# Altium PCB 剥皮器20200614.PCBDOC (part 3 of 3)
Units mm, origin at the board's own origin, x right, y up, seen from the top; angles counter-clockwise.
Board outline 140 x 88 mm, 4 copper layers (Top Layer, MidLayer1, MidLayer2, Bottom Layer); 134 components, 105 nets, 507 pads, 469 vias.
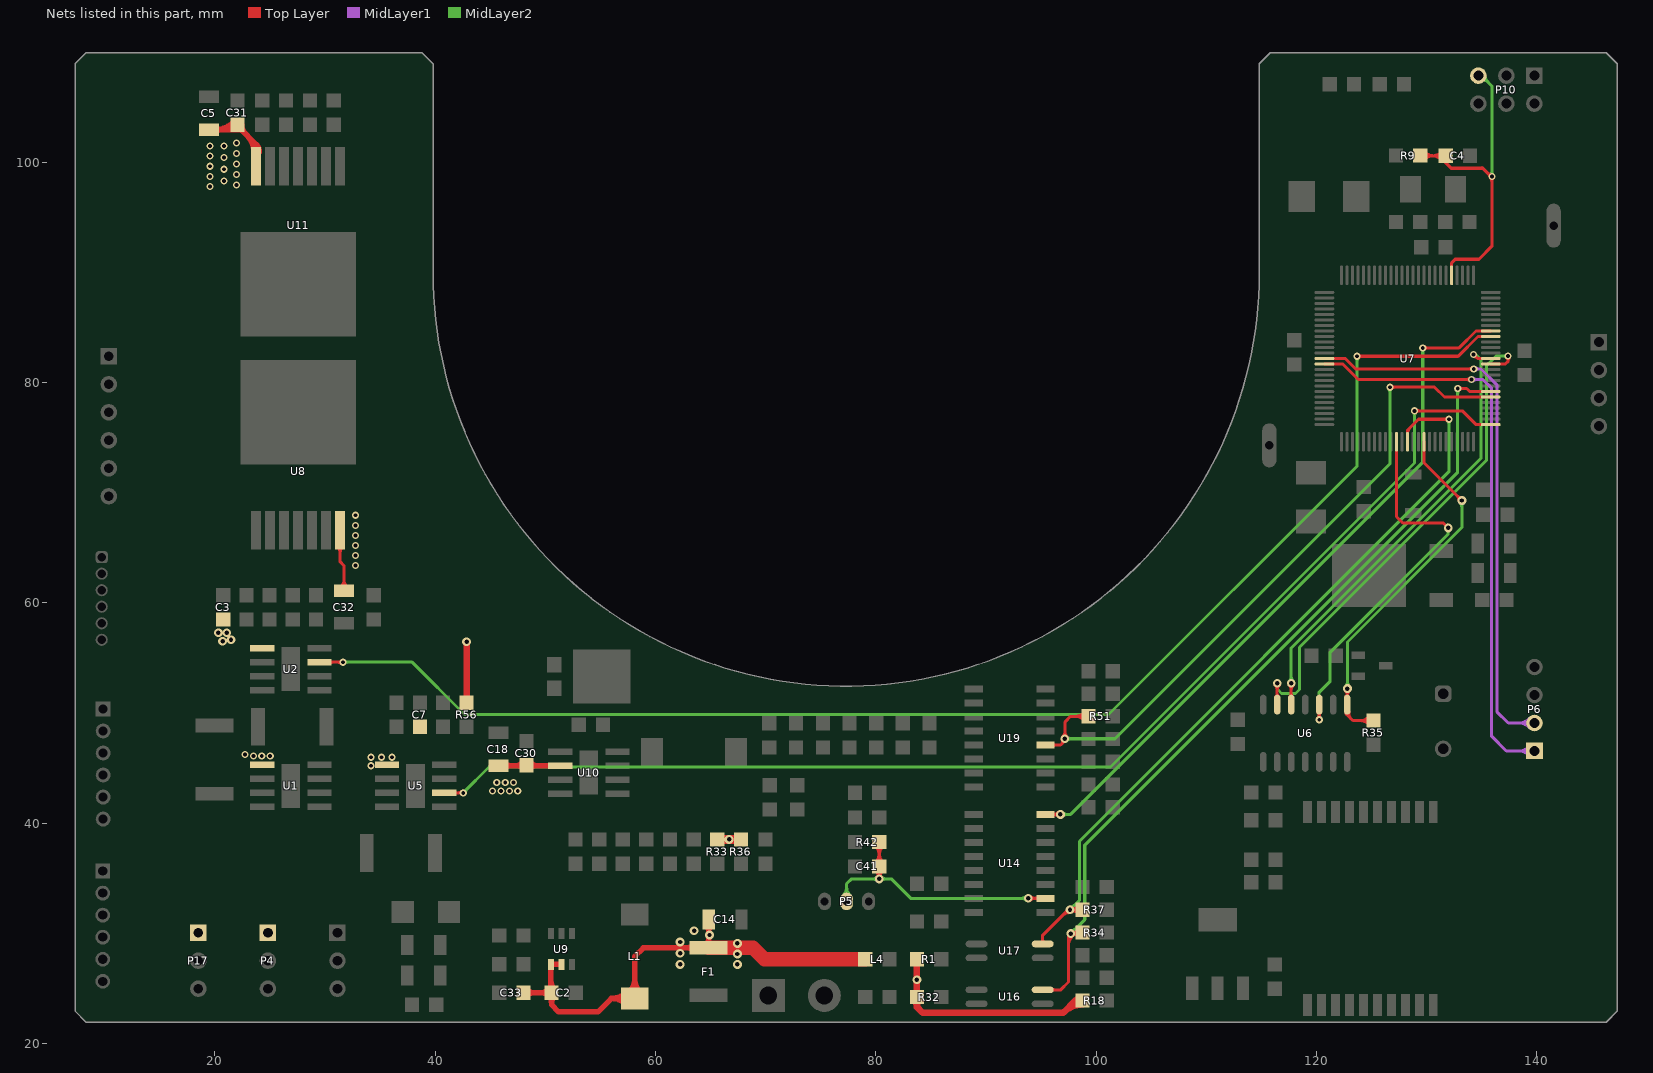
[diagram p5: the nets of this part, all layers, seen from the top]

## Via types
v1: diameter 0.65, hole 0.35, Top Layer to Bottom Layer, 296 vias
v2: diameter 0.8, hole 0.4, Top Layer to Bottom Layer, 161 vias
v3: diameter 1.27, hole 0.711, Top Layer to Bottom Layer, 6 vias
v4: diameter 1, hole 0.5, Top Layer to Bottom Layer, 6 vias

## Nets (pads, with @x,y where several pads share a name; then routed paths per layer and width w, separated by ;. In a path a pad name is that pad's centre, name@x,y a point inside that pad or via, vN(x,y) a via of type N, cw(c..) or ccw(c..) an arc to the next point about the centre after c; other vN are vias at no path point) (continued)
PE4: R51.2 U7.6 U19.12 | length 68.7
  Top Layer w0.28: U19.12@95.393,47.086 96.77,47.086 97.18,47.496 97.18,49.197 97.673,49.69 R51.2@99.306,49.69 ; U19.12@96.024,46.955 cw(c96.34,46.64) 96.34,47.086 cw(c96.34,47.533) U19.12@96.024,47.217 ; 96.865,47.181 ccw(c96.648,47.398) v2@96.921,47.538 ; v2@96.968,47.841 ccw(c96.457,48.352) 97.18,48.352 ; 97.18,48.217 ccw(c97.712,48.217) v2@97.336,47.841 ; R51.2@98.947,49.331 ccw(c98.081,48.465) 98.081,49.69 ccw(c98.081,50.916) R51.2@98.947,50.049 ; v1@126.666,79.572 130.719,79.572 131.614,78.676 U7.6@135.817,78.676 ; v1@126.795,79.441 cw(c127.111,79.125) 127.111,79.572 cw(c127.111,80.018) v1@126.795,79.702
  MidLayer2 w0.28: v2(97.152,47.657) 101.715,47.657 102.982,48.924 126.666,72.609 v1@126.666,79.572 ; v2@97.336,47.473 cw(c97.78,47.029) 97.78,47.657 cw(c97.78,48.285) v2@97.336,47.841 ; v1@126.533,79.441 cw(c126.212,79.119) 126.666,79.119 ; 126.666,79.131 cw(c127.105,79.131) v1@126.795,79.441
  other v1: 126.664,79.572
PE5: R34.1 U7.7 U16.4 | length 82.2
  Top Layer w0.28: U16.4@95.143,24.867 96.783,24.867 97.495,25.579 97.495,29.772 v2(97.691,29.968) ; U16.4@95.956,24.753 cw(c96.229,24.48) 96.229,24.867 cw(c96.229,25.253) U16.4@95.956,24.98 ; 97.495,28.867 cw(c98.792,28.867) 97.875,29.784 cw(c98.319,29.34) 98.319,29.968 cw(c98.319,30.596) v2@97.875,30.152 ; 97.495,29.543 cw(c98.116,29.543) v2@97.677,29.982 ; v2@97.786,29.968 cw(c97.786,29.094) R34.1@98.405,29.712 ; R34.1@98.327,30.33 cw(c97.691,30.708) v2(97.691,29.968) ; R34.1@98.531,29.968 v2(97.691,29.968) ; v1@132.663,79.46 133.625,79.46 133.908,79.176 U7.7@135.817,79.176 ; v1@132.948,79.313 cw(c133.301,78.96) 133.301,79.46 ; v1@132.948,79.575 ccw(c133.226,79.853) 133.226,79.46
  MidLayer2 w0.28: v2(97.691,29.968) 98.963,31.24 98.963,37.995 132.817,71.849 v1(132.817,79.444) ; v2@97.691,30.228 ccw(c97.691,30.856) 98.135,30.412 ccw(c98.579,29.968) v2@97.951,29.968 ; v1@132.686,79.313 cw(c132.37,78.997) 132.817,78.997 cw(c133.264,78.997) v1@132.948,79.313
PF6: R35.2 U6.8 U7.91 | length 41.7
  Top Layer w0.28: v2@122.623,52.03 cw(c122.179,51.586) 122.807,51.586 cw(c123.435,51.586) v2@122.991,52.03 ; U6.8@122.667,50.184 ccw(c123.033,50.103) 122.768,49.838 ; U6.8@122.671,51.472 ccw(c122.342,51.801) 122.807,51.801 ; U6.8@122.784,50.501 122.784,49.822 ; U6.8@122.807,50.501 v2(122.807,52.214) ; 122.807,51.689 ccw(c123.114,51.689) U6.8@122.897,51.472 ; U6.8@122.94,50.124 ccw(c123.624,49.973) 123.129,49.477 ; R35.2@124.812,48.95 ccw(c123.946,48.084) 123.946,49.309 ccw(c123.946,50.535) R35.2@124.812,49.668 ; R35.2@125.171,49.309 123.297,49.309 122.784,49.822 ; U7.91@129.767,74.626 129.767,72.715 v2(133.195,69.287) ; v2@132.935,69.287 ccw(c132.307,69.287) 132.751,69.731 ccw(c133.195,70.175) v2@133.195,69.547 ; 122.784,49.822 ccw(c122.511,49.822) 122.683,50.034 cw(c122.511,49.822) 122.784,49.822 ; 122.784,49.822 cw(c123.057,49.822) 122.885,50.034 ccw(c123.057,49.822) 122.784,49.822
  MidLayer2 w0.28: v2@122.623,52.398 ccw(c122.179,52.842) 122.807,52.842 ccw(c123.435,52.842) v2@122.991,52.398 ; v2(122.807,52.214) 122.807,56.442 133.195,66.83 v2(133.195,69.287) ; v2@133.011,69.103 cw(c132.567,68.659) 133.195,68.659 cw(c133.823,68.659) v2@133.379,69.103
PG5: U5.2 U7.1 | length 116.2
  Top Layer w0.28: U5.2@40.813,42.748 v1(42.545,42.748) ; U5.2@41.727,42.635 cw(c42,42.362) 42,42.748 cw(c42,43.134) U5.2@41.727,42.861 ; v1@42.414,42.617 ccw(c42.098,42.302) 42.098,42.748 ccw(c42.098,43.195) v1@42.414,42.879 ; v1(128.902,77.427) 133.245,77.427 134.495,76.176 U7.1@135.817,76.176 ; v1@129.032,77.296 cw(c129.348,76.98) 129.348,77.427 cw(c129.348,77.873) v1@129.032,77.557
  MidLayer2 w0.28: v1@42.545,42.933 ccw(c42.545,43.38) 42.861,43.064 ccw(c43.177,42.748) v1@42.73,42.748 ; v1@42.621,42.748 v1(42.545,42.748) 44.885,45.088 101.305,45.088 128.902,72.685 v1(128.902,77.427) ; v1@128.771,77.296 cw(c128.455,76.98) 128.902,76.98 cw(c129.348,76.98) v1@129.032,77.296
PH0_RXD2: U6.13 U7.12 | length 50.2
  Top Layer w0.28: v2@116.25,52.513 cw(c115.806,52.069) 116.434,52.069 cw(c117.061,52.069) v2@116.618,52.513 ; U6.13@116.321,51.472 ccw(c116.048,51.745) 116.434,51.745 ccw(c116.82,51.745) U6.13@116.547,51.472 ; U6.13@116.434,50.758 v2(116.434,52.697) ; U7.12@135.817,81.676 137.142,81.676 137.395,81.929 v1(137.395,82.391) ; v1@137.264,82.26 cw(c136.948,81.944) 137.395,81.944 cw(c137.842,81.944) v1@137.526,82.26
  MidLayer2 w0.28: v2(116.434,52.697) 116.434,52.161 ; v1@137.264,82.26 ccw(c136.948,81.944) 136.948,82.391 ccw(c136.948,82.838) v1@137.264,82.522 ; v1(137.395,82.391) 136.296,82.391 135.432,81.527 135.432,72.938 118.45,55.956 118.45,52.127 118.089,51.766 116.829,51.766 116.434,52.161 ; 116.434,52.161 ccw(c116.012,52.161) 116.273,52.493 cw(c116.012,52.161) 116.434,52.161 ; 116.434,52.161 cw(c116.855,52.161) 116.595,52.493 ccw(c116.855,52.161) 116.434,52.161
PH1_TXD2: U6.12 U7.13 | length 45
  Top Layer w0.28: v2@117.52,52.513 cw(c117.076,52.069) 117.704,52.069 cw(c118.331,52.069) v2@117.888,52.513 ; U6.12@117.591,51.472 ccw(c117.318,51.745) 117.704,51.745 ccw(c118.09,51.745) U6.12@117.817,51.472 ; U6.12@117.704,50.758 v2(117.704,52.697) ; v1@134.245,82.369 cw(c134.245,81.922) 134.561,82.238 cw(c134.877,82.554) v1@134.43,82.554 ; v1(134.245,82.554) 134.622,82.176 U7.13@135.817,82.176
  MidLayer2 w0.28: v2@117.52,52.881 ccw(c117.076,53.324) 117.704,53.324 ccw(c118.331,53.324) v2@117.888,52.881 ; v2(117.704,52.697) 117.704,55.896 134.952,73.144 134.952,82.008 134.406,82.554 v1(134.245,82.554) ; v1@134.245,82.369 cw(c134.245,81.533) 134.836,82.124
PH5: U2.3 U7.17 | length 131.7
  Top Layer w0.28: U2.3@29.499,54.61 v1(31.623,54.61) ; U2.3@30.412,54.497 cw(c30.685,54.224) 30.685,54.61 cw(c30.685,54.996) U2.3@30.412,54.723 ; v1@31.492,54.479 ccw(c31.176,54.163) 31.176,54.61 ccw(c31.176,55.057) v1@31.492,54.741 ; v1(123.686,82.38) 132.864,82.38 134.661,84.176 U7.17@135.817,84.176 ; v1@123.817,82.249 cw(c124.133,81.933) 124.133,82.38 cw(c124.133,82.826) v1@123.817,82.51
  MidLayer2 w0.28: v1(31.623,54.61) 37.903,54.61 42.653,49.859 101.123,49.859 123.686,72.422 v1(123.686,82.38) ; v1@31.754,54.479 cw(c32.07,54.163) 32.07,54.61 cw(c32.07,55.057) v1@31.754,54.741 ; v1@123.555,82.249 cw(c123.239,81.933) 123.686,81.933 cw(c124.133,81.933) v1@123.817,82.249
PH6: U7.18 U14.8 | length 68.8
  Top Layer w0.28: U14.8@95.393,40.792 v2@96.783,40.792 ; U14.8@96.024,40.661 cw(c96.34,40.346) 96.34,40.792 cw(c96.34,41.239) U14.8@96.024,40.923 ; v2@96.564,40.608 ccw(c96.121,40.165) 96.121,40.792 ccw(c96.121,41.42) v2@96.564,40.976 ; v1(129.647,83.142) 132.947,83.142 134.482,84.676 U7.18@135.817,84.676 ; v1@129.777,83.011 cw(c130.093,82.695) 130.093,83.142 cw(c130.093,83.588) v1@129.777,83.272
  MidLayer2 w0.28: v2@96.783,40.792 97.688,40.792 129.647,72.751 v1(129.647,83.142) ; v2@96.932,40.608 cw(c97.376,40.165) 97.376,40.792 cw(c97.376,41.42) v2@96.932,40.976 ; v1@129.516,83.011 cw(c129.2,82.695) 129.647,82.695 cw(c130.093,82.695) v1@129.777,83.011
  other v2: 96.748,40.792
PJ0_RX3: P6.2 U7.63 | length 55.1
  Top Layer w0.28: U7.63@120.717,82.176 122.61,82.176 123.556,81.231 v1(134.273,81.231) ; v1@134.142,81.1 ccw(c133.826,80.784) 133.826,81.231 ccw(c133.826,81.677) v1@134.142,81.361
  MidLayer1 w0.28: v1(134.273,81.231) 134.936,81.231 136.377,79.79 136.377,50.124 137.413,49.088 P6.2@139.79,49.088 ; v1@134.404,81.1 cw(c134.72,80.784) 134.72,81.231 cw(c134.72,81.677) v1@134.404,81.361 ; P6.2@139.359,48.657 ccw(c138.317,47.616) 138.317,49.088 ccw(c138.317,50.561) P6.2@139.359,49.52 ; P6.2@139.557,48.855 ccw(c138.993,48.292) 138.993,49.088 ccw(c138.993,49.885) P6.2@139.557,49.322
PJ1_TX3: P6.1 U7.64 | length 57.1
  Top Layer w0.28: U7.64@120.717,81.676 122.397,81.676 123.802,80.272 v1(134.084,80.272) ; v1@133.953,80.141 ccw(c133.637,79.825) 133.637,80.272 ccw(c133.637,80.718) v1@133.953,80.402
  MidLayer1 w0.28: v1(134.084,80.272) 135.104,80.272 135.897,79.479 135.897,47.881 137.23,46.548 P6.1@139.79,46.548 ; v1@134.215,80.141 cw(c134.531,79.825) 134.531,80.272 cw(c134.531,80.718) v1@134.215,80.402 ; P6.1@139.359,46.117 ccw(c138.317,45.076) 138.317,46.548 ccw(c138.317,48.021) P6.1@139.359,46.98 ; P6.1@139.557,46.315 ccw(c138.993,45.752) 138.993,46.548 ccw(c138.993,47.345) P6.1@139.557,46.782
PK1: R37.1 U7.88 U17.4 | length 76.7
  Top Layer w0.28: U17.4@95.03,29.145 ccw(c94.757,29.418) 95.143,29.418 ccw(c95.529,29.418) U17.4@95.256,29.145 ; U17.4@95.143,29.032 95.143,29.828 97.451,32.136 R37.1@98.764,32.136 ; 96.89,31.575 cw(c97.621,30.845) v2@97.621,31.878 ; v2@97.805,31.954 cw(c98.245,31.514) R37.1@98.245,32.136 ; v2@97.805,32.322 ccw(c98.253,32.77) R37.1@98.253,32.136 ; R37.1@98.405,31.777 ccw(c97.538,30.911) 97.538,32.136 ccw(c97.538,33.362) R37.1@98.405,32.495 ; U7.88@128.267,74.626 128.267,75.665 129.266,76.665 v1@132.159,76.665 ; U7.88@128.267,75.386 cw(c128.94,75.386) 128.464,75.862 ; 131.556,76.665 cw(c131.556,76.195) v1@131.888,76.527 ; 131.588,76.665 ccw(c131.588,77.089) v1@131.888,76.789
  MidLayer2 w0.28: v2(97.621,32.138) 98.483,33 98.483,38.348 132.019,71.884 v1(132.019,76.658) ; v2@97.621,32.398 ccw(c97.621,33.026) 98.065,32.582 ccw(c98.509,32.138) v2@97.881,32.138 ; v1@131.888,76.527 cw(c131.572,76.211) 132.019,76.211 cw(c132.466,76.211) v1@132.15,76.527
PK3: U6.10 U7.86 | length 38
  Top Layer w0.28: v1@120.113,49.521 ccw(c119.797,49.837) 120.244,49.837 ccw(c120.69,49.837) v1@120.375,49.521 ; U6.10@120.131,50.045 cw(c119.858,49.772) 120.244,49.772 cw(c120.63,49.772) U6.10@120.357,50.045 ; v1(120.244,49.39) U6.10@120.244,50.758 ; U7.86@127.267,74.626 127.267,67.816 127.84,67.243 131.512,67.243 v2(131.953,66.802)
  MidLayer2 w0.28: v1@120.113,49.521 ccw(c119.797,49.837) 120.244,49.837 ccw(c120.69,49.837) v1@120.375,49.521 ; v1(120.244,49.39) 120.244,51.877 121.24,52.873 121.24,55.526 131.953,66.239 v2(131.953,66.802) ; v2@131.842,67.038 cw(c131.398,66.594) v2@132.026,66.594
RESET: C4.1 P10.5 R9.1 U7.30 | length 36.8
  Top Layer w0.28: R9.1@129.767,100.238 cw(c130.575,99.429) 130.575,100.573 ; R9.1@129.767,100.956 ccw(c130.691,101.88) 130.691,100.573 ; R9.1@129.83,100.573 C4.1@131.739,100.573 131.739,99.906 ; C4.1@131.38,100.214 ccw(c130.513,99.347) 130.513,100.573 ccw(c130.513,101.798) C4.1@131.38,100.932 ; C4.1@131.604,100.083 cw(c131.555,99.906) 131.739,99.906 ; C4.1@131.739,99.941 132.229,99.451 135.042,99.451 ; C4.1@131.874,100.083 ccw(c131.922,99.906) 131.739,99.906 ; U7.30@132.267,89.726 132.267,90.865 132.588,91.186 134.752,91.186 135.918,92.352 135.918,98.624 135.042,99.5 ; 135.495,99.047 ccw(c135.918,99.471) v1@135.918,98.872 ; 135.647,98.895 cw(c135.438,98.687) v1@135.733,98.687 ; v1@135.787,98.556 cw(c135.471,98.24) 135.918,98.24 cw(c136.365,98.24) v1@136.049,98.556
  MidLayer2 w0.28: P10.5@134.696,107.855 134.982,107.855 135.918,106.919 v1@135.918,98.759 ; P10.5@134.727,107.527 cw(c134.833,106.391) 135.639,107.198 ; P10.5@135.306,107.855 ccw(c136.089,107.855) 135.536,107.301 ; v1@135.787,98.818 ccw(c135.471,99.134) 135.918,99.134 ccw(c136.365,99.134) v1@136.049,98.818
  other v1: 135.918,98.687
VCC: C2.1 C3.1 C5.1 C7.1 C14.1 C18.1 C30.2 C31.1 C32.1 C33.2 F1.2 L1.1 L4.1 P4.1 P17.1 R1.1 R18.2 R32.1 R33.1 R36.1 R56.2 U1.5 U2.5 U5.5 U8.7 U9.4 U9.5 U10.2 U11.7 | length 125.8
  Top Layer w0.28: U8.7@31.15,65.08 cw(c30.621,64.55) 31.369,64.55 cw(c32.117,64.55) U8.7@31.588,65.08 ; U8.7@31.369,66.599 31.369,63.722 31.725,63.366 C32.1@31.725,61.104 ; C32.1@31.424,61.404 ccw(c30.699,62.13) 31.725,62.13 ccw(c32.751,62.13) C32.1@32.025,61.404
  Top Layer w0.5: C5.1@19.456,102.955 C31.1@22.056,102.955 ; C5.1@20.014,102.732 cw(c20.552,102.194) 20.552,102.955 cw(c20.552,103.715) C5.1@20.014,103.178 ; C5.1@20.023,102.955 ccw(c20.023,105.42) C31.1@21.766,103.677 ; 21.23,102.955 ccw(c21.23,104.213) C31.1@22.12,103.323 ; C31.1@22.047,102.998 cw(c22.047,102.264) C31.1@22.566,102.783 ; C31.1@22.225,103.124 23.749,101.6 U11.7@23.749,99.619 ; C31.1@22.445,103.396 ccw(c23.631,103.396) 22.792,102.557 ; 22.926,102.423 cw(c21.422,100.919) U11.7@23.549,100.919 ; U11.7@23.608,101.06 ccw(c23.266,101.402) 23.749,101.402 ccw(c24.232,101.402) U11.7@23.89,101.06 ; 23.779,101.57 cw(c23.129,100.919) U11.7@24.049,100.919 ; C18.1@45.754,45.212 U10.2@51.35,45.212 ; C18.1@46.303,44.998 cw(c46.82,44.481) 46.82,45.212 ; C18.1@46.303,45.443 ccw(c46.862,46.002) 46.862,45.212 ; 47.221,45.212 ccw(c47.221,46.319) C30.2@48.004,45.536 ; 47.429,45.212 cw(c47.429,44.399) C30.2@48.004,44.974 ; C33.2@48.01,24.61 C2.1@50.559,24.61 50.559,23.515 51.211,22.863 54.76,22.863 55.987,24.09 L1.1@58.111,24.09 58.111,27.887 58.903,28.679 F1.2@64.816,28.679 ; C33.2@48.291,24.328 cw(c48.97,23.649) 48.97,24.61 cw(c48.97,25.57) C33.2@48.291,24.891 ; C30.2@48.567,44.974 cw(c49.142,44.399) 49.142,45.212 ; C30.2@48.567,45.536 ccw(c49.349,46.319) 49.349,45.212 ; C2.1@50.506,24.663 U9.4@50.506,27.172 U9.5@51.456,27.172 ; 50.506,25.441 cw(c49.728,25.441) 50.278,24.891 cw(c49.599,25.57) 49.599,24.61 cw(c49.599,23.649) 50.278,24.328 cw(c49.599,23.649) 50.559,23.649 cw(c51.52,23.649) C2.1@50.841,24.328 ; 50.506,25.698 ccw(c51.648,25.698) C2.1@50.841,24.891 ; L1.1@57.33,23.56 ccw(c56.05,22.28) 56.05,24.09 ccw(c56.05,25.901) L1.1@57.33,24.621 ; L1.1@57.58,24.621 ccw(c56.3,25.901) 58.111,25.901 ccw(c59.921,25.901) L1.1@58.641,24.621 ; F1.2@63.459,28.431 ccw(c62.861,27.834) 62.861,28.679 ccw(c62.861,29.524) F1.2@63.459,28.926 ; F1.2@64.569,28.926 ccw(c63.95,29.545) v2@64.825,29.545 ; C14.1@64.602,30.707 cw(c64.065,30.169) 64.825,30.169 cw(c65.586,30.169) C14.1@65.048,30.707 ; F1.2@64.825,28.688 C14.1@64.825,31.264 ; v2@64.825,29.503 ccw(c65.64,29.503) F1.2@65.064,28.926
  Top Layer w0.6: R56.2@42.85,50.939 v2(42.85,56.464) ; R1.1@83.728,27.641 83.728,23.309 84.244,22.793 97.019,22.793 98.124,23.898 R18.2@98.764,23.898 ; 97.079,22.853 cw(c98.764,21.168) R18.2@98.764,23.551 ; 98.103,23.877 cw(c98.764,23.217) R18.2@98.764,24.151 ; 83.728,23.376 ccw(c82.889,23.376) 83.482,23.97 cw(c82.889,23.376) 83.728,23.376 ; 83.728,23.376 cw(c84.568,23.376) 83.974,23.97 ccw(c84.568,23.376) 83.728,23.376
  Top Layer w0.8: R33.1@65.608,38.521 R36.1@67.754,38.521
  Top Layer w1.295: F1.2@64.825,28.688 68.843,28.688 69.89,27.641 L4.1@79.033,27.641
  other v1: 45.212,42.926 45.974,42.926 46.736,42.926 47.498,42.926 45.593,43.688 46.355,43.688 47.117,43.688 34.163,45.212 34.163,45.974 35.119,45.974 36.074,45.974 23.495,46.101 24.257,46.101 25.019,46.101 22.733,46.228 32.766,63.373 32.766,64.287 32.766,65.202 32.766,66.116 32.766,67.031 32.766,67.945 19.558,97.79 21.971,97.917 20.828,98.298 19.558,98.711 21.971,98.87 20.828,99.356 19.558,99.632 21.971,99.822 20.828,100.415 19.558,100.552 21.971,100.774 19.558,101.473 20.828,101.473 21.971,101.727
  other v2: 83.728,25.781 62.23,27.178 67.437,27.178 67.437,28.117 62.23,28.194 67.437,29.083 62.23,29.21 64.897,29.845 63.5,30.226 66.675,38.521 20.701,56.515 21.463,56.642 20.32,57.277 21.082,57.277
霍尔: C41.1 P5.2 R42.2 U14.2 | length 36.8
  Top Layer w0.28: C41.1@79.955,36.427 ccw(c79.088,37.294) 80.313,37.294 ccw(c81.539,37.294) C41.1@80.673,36.427 ; R42.2@79.954,37.919 cw(c79.088,37.052) 80.313,37.052 cw(c81.539,37.052) R42.2@80.672,37.919 ; C41.1@79.976,35.688 cw(c79.31,34.938) v2(80.313,34.938) cw(c81.317,34.938) C41.1@80.651,35.688 ; v2@80.13,35.122 ccw(c79.686,35.566) 80.313,35.566 ccw(c80.941,35.566) v2@80.497,35.122 ; v2(80.313,34.938) C41.1@80.314,36.068 R42.2@80.313,38.278 ; v2(93.836,33.172) U14.2@95.393,33.172 ; v2@94.02,32.988 cw(c94.463,32.545) 94.463,33.172 cw(c94.463,33.8) v2@94.02,33.356 ; U14.2@94.762,33.041 ccw(c94.447,32.726) 94.447,33.172 ccw(c94.447,33.619) U14.2@94.762,33.303
  MidLayer2 w0.28: P5.2@77.018,33.418 ccw(c76.232,34.204) 77.343,34.204 ccw(c78.454,34.204) P5.2@77.668,33.418 ; P5.2@77.343,32.893 77.343,34.483 77.798,34.938 81.402,34.938 83.168,33.172 v2(93.836,33.172) ; v2@80.13,34.754 ccw(c79.686,34.31) 79.686,34.938 ccw(c79.686,35.566) v2@80.13,35.122 ; v2@80.497,34.754 cw(c80.941,34.31) 80.941,34.938 cw(c80.941,35.566) v2@80.497,35.122 ; v2@93.652,32.988 ccw(c93.208,32.545) 93.208,33.172 ccw(c93.208,33.8) v2@93.652,33.356
pads on no net: P1.4 P3.4 P7.4 P13.4 U6.6 U6.9 U7.4 U7.8 U7.9 U7.14 U7.15 U7.16 U7.19 U7.27 U7.28 U7.29 U7.35 U7.36 U7.37 U7.38 U7.39 U7.40 U7.41 U7.42 U7.47 U7.48 U7.49 U7.51 U7.52 U7.54 U7.55 U7.56 U7.57 U7.58 U7.59 U7.60 U7.65 U7.66 U7.67 U7.68 U7.69 U7.70 U7.71 U7.73 U7.74 U7.75 U7.77 U7.78 U7.79 U7.82 U7.83 U7.84 U7.87 U7.90 U7.92 U7.93 U7.94 U7.95 U7.96 U7.97 U9.6 U12.2 U12.8 U12.12 U12.13 U12.14 U12.15 U12.16 U12.17 U12.18 U12.19

## Polygon pours and split planes (outlines as drawn)
VCC on Top Layer "Top Layer-No Net" (hatched 90Degree grid 0.254 track 0.254, remove dead copper, pour order 1005): 30.988,68.58 32.893,68.58 33.147,68.326 33.147,67.437 33.147,60.836 32.925,60.614 32.89,60.579 32.258,60.579 31.115,60.579 30.988,60.706 30.861,60.833 30.861,64.77 30.861,68.453 30.988,68.58
VCC on Top Layer "Top Layer-No Net" (hatched 90Degree grid 0.254 track 0.254, remove dead copper, pour order 1004): 18.796,104.14 22.479,104.14 22.733,103.886 22.733,103.124 23.749,102.108 24.257,101.6 24.257,100.457 24.257,97.662 24.014,97.419 18.659,97.419 18.415,97.663 18.288,97.79 18.288,98.298 18.288,103.886 18.542,104.14 18.796,104.14
NetP13_1 on Top Layer "Top Layer-No Net" (hatched 90Degree grid 0.254 track 0.254, remove dead copper, pour order 1003): 15.621,81.534 19.685,81.534 21.971,83.82 21.286,84.505 19.685,84.505 18.288,84.505 17.526,83.743 16.764,82.981 16.129,82.981
NetP13_1 on Top Layer "Top Layer-No Net" (hatched 90Degree grid 0.254 track 0.254, remove dead copper, pour order 1002): 9.404,82.55 9.404,84.588 9.779,84.963 12.065,84.963 17.653,84.963 18.923,86.233 18.112,85.422 18.112,84.152 17.045,84.152 15.621,82.727 15.367,82.473 13.716,82.473
NetP13_6 on Top Layer "Top Layer-No Net" (hatched 90Degree grid 0.254 track 0.254, remove dead copper, pour order 1001): 10.033,67.945 20.066,67.945 22.225,70.104 22.479,70.358 30.099,70.358 32.258,70.358 32.766,70.866 32.893,70.993 32.893,72.644 32.893,81.661 32.639,81.915 32.131,81.915 22.352,81.915 22.225,81.788 22.098,81.661 22.098,81.534 22.098,78.232 16.51,72.644 14.732,70.866 10.287,70.866 9.652,70.866 9.525,70.739 9.398,70.612 9.398,70.358 9.398,68.199 9.652,67.945 10.033,67.945
NetP13_1 on Top Layer "Top Layer-No Net" (hatched 90Degree grid 0.254 track 0.254, remove dead copper, pour order 1000): 10.033,81.534 16.002,81.534 16.764,81.534 18.415,83.185 19.05,83.82 27.305,83.82 32.639,83.82 32.893,84.074 33.02,84.201 33.02,84.455 33.02,93.599 32.766,93.853 32.004,93.853 22.352,93.853 22.098,93.599 22.098,93.472 22.098,87.503 21.336,86.741 20.828,86.233 19.177,86.233 18.923,86.233 18.034,85.344 16.002,83.312 9.652,83.312 9.525,83.312 9.398,83.185 9.398,83.058 9.398,81.661 9.525,81.534 10.033,81.534
VCC on Top Layer "Top Layer-No Net" (hatched 90Degree grid 0.254 track 0.254, remove dead copper, pour order 1002): 24.765,55.626 20.955,55.626 20.066,56.515 19.812,56.769 19.812,58.42 19.812,59.182 21.463,59.182 21.463,57.404 21.844,57.023 22.606,56.261 25.273,56.261 25.273,55.626 24.765,55.626
NetR4_2 on Top Layer "Top Layer-No Net" (hatched 90Degree grid 0.254 track 0.254, remove dead copper, pour order 1003): 25.019,52.959 20.955,52.959 20.828,53.086 20.828,53.467 20.828,53.721 20.955,53.848 21.59,53.848 25.273,53.848 25.273,52.959 25.019,52.959
NetR4_2 on Top Layer "Top Layer-No Net" (hatched 90Degree grid 0.254 track 0.254, remove dead copper, pour order 1004): 23.749,46.99 24.765,46.99 25.273,46.99 25.4,47.117 25.4,47.498 25.4,50.165 25.146,50.419 24.892,50.419 23.241,50.419 23.241,47.244 23.495,46.99 23.749,46.99
GND on Top Layer "Top Layer-No Net" (hatched 90Degree grid 0.254 track 0.254, remove dead copper, pour order 1005): 29.845,46.99 31.242,46.99 31.75,47.498 32.131,47.879 32.131,48.514 32.131,52.07 32.004,52.197 31.75,52.451 29.718,52.451 28.702,52.451 28.448,52.197 28.448,52.07 28.448,47.371 28.829,46.99 29.845,46.99
NetR3_2 on Top Layer "Top Layer-No Net" (hatched 90Degree grid 0.254 track 0.254, remove dead copper, pour order 1007): 24.892,43.18 22.606,43.18 22.098,43.18 21.844,43.434 21.336,43.434 18.415,43.434 18.288,43.307 18.288,43.18 18.288,42.164 18.415,42.037 19.05,42.037 21.59,42.037 21.844,42.291 21.971,42.418 23.368,42.418 25.273,42.418 25.273,43.18 24.892,43.18
VCC on Top Layer "Top Layer-No Net" (hatched 90Degree grid 0.254 track 0.254, remove dead copper, pour order 1009): 23.495,44.958 25.273,44.958 25.4,45.085 25.4,45.339 25.4,46.228 25.146,46.482 25.019,46.482 22.479,46.482 22.352,46.355 22.352,46.228 22.352,45.847 22.733,45.466 23.241,44.958 23.495,44.958
GND on Top Layer "Top Layer-No Net" (hatched 90Degree grid 0.254 track 0.254, remove dead copper, pour order 1014): 21.336,48.133 15.875,48.133 15.24,48.768 15.24,49.276 15.24,49.657 15.621,50.038 16.129,50.038 21.64,50.038 21.971,49.707 21.971,48.387 21.717,48.133 21.336,48.133
VCC on Top Layer "Top Layer-No Net" (hatched 90Degree grid 0.254 track 0.254, remove dead copper, pour order 1017): 36.195,44.831 34.163,44.831 33.782,45.212 33.782,45.72 33.782,47.117 34.29,47.625 36.449,47.625 37.338,47.625 37.592,47.879 37.719,48.006 37.719,48.514 37.719,49.276 37.846,49.403 37.973,49.53 38.608,49.53 39.497,49.53 39.624,49.403 39.624,49.276 39.624,47.244 39.37,46.99 38.989,46.609 37.846,46.609 37.211,46.609 36.957,46.355 36.83,46.228 36.83,45.974 36.83,44.958 36.703,44.831 36.195,44.831
GND on Top Layer "Top Layer-No Net" (hatched 90Degree grid 0.254 track 0.254, remove dead copper, pour order 1024): 46.228,46.863 49.022,46.863 49.911,47.752 51.689,49.53 51.689,54.991 51.689,57.531 51.435,57.785 51.308,57.912 50.673,57.912 46.99,57.912 46.482,57.404 46.482,57.15 46.482,50.673 44.958,49.149 44.958,48.006 44.958,47.117 45.212,46.863 46.228,46.863
NetC17_2 on Top Layer "Top Layer-No Net" (hatched 90Degree grid 0.254 track 0.254, remove dead copper, pour order 1025): 55.88,46.101 57.785,46.101 58.547,45.339 58.674,45.212 60.198,45.212 60.579,45.212 60.706,45.339 60.706,45.466 60.706,53.848 59.182,55.372 58.674,55.88 57.277,55.88 52.578,55.88 52.451,55.753 52.451,55.499 52.451,50.927 52.705,50.673 53.34,50.673 54.102,50.673 54.483,50.292 54.61,50.165 54.61,49.53 54.61,48.26 54.737,48.133 55.118,48.133 55.245,48.133 55.499,47.879 55.499,47.371 55.499,46.101 55.88,46.101
NetC17_1 on Top Layer "Top Layer-No Net" (hatched 90Degree grid 0.254 track 0.254, remove dead copper, pour order 1026): 50.419,46.228 52.324,46.228 52.451,46.355 52.578,46.482 52.578,47.879 52.832,48.133 53.34,48.133 53.594,48.133 53.721,48.26 53.721,48.387 53.721,49.657 52.324,49.657 51.562,48.895 50.419,47.752 50.419,46.228
VCC on Top Layer "Top Layer-No Net" (hatched 90Degree grid 0.254 track 0.254, remove dead copper, pour order 1027): 51.943,45.593 49.53,45.593 49.149,45.974 48.387,45.974 44.831,45.974 44.704,45.847 44.704,45.466 44.704,42.799 44.831,42.672 44.958,42.545 45.847,42.545 48.641,42.545 48.895,42.799 49.022,42.926 49.022,43.942 49.022,44.704 49.149,44.831 52.451,44.831 52.451,45.593 51.943,45.593
GND on Top Layer "Top Layer-No Net" (hatched 90Degree grid 0.254 track 0.254, remove dead copper, pour order 1030): 73.152,42.164 63.754,42.164 62.865,41.275 62.484,40.894 62.484,39.116 62.484,38.1 62.738,37.846 63.754,37.846 64.008,37.846 64.135,37.973 64.135,39.243 64.389,39.497 64.77,39.878 67.31,39.878 69.088,39.878 69.469,39.497 69.469,39.116 69.469,38.227 69.723,37.973 70.231,37.973 73.279,37.973 73.406,38.1 73.406,38.989 73.406,41.91 73.152,42.164
+5V on Top Layer "Top Layer-No Net" (hatched 90Degree grid 0.254 track 0.254, remove dead copper, pour order 1031): 112.776,26.162 115.189,26.162 116.459,26.162 116.84,25.781 116.84,25.654 116.84,23.241 116.586,22.987 116.078,22.987 113.03,22.987 112.776,23.241 112.776,23.622 112.776,26.162
GND on Top Layer "Top Layer-No Net" (hatched 90Degree grid 0.254 track 0.254, remove dead copper, pour order 1034): 19.685,59.944 21.336,59.944 21.463,60.071 21.463,60.579 21.463,61.976 22.606,63.119 24.13,64.643 24.13,66.167 24.13,68.199 24.003,68.326 23.876,68.326 22.606,68.326 22.352,68.072 22.352,67.818 22.352,65.532 20.574,63.754 19.685,62.865 19.685,59.944
GND on Top Layer "Top Layer-No Net" (hatched 90Degree grid 0.254 track 0.254, remove dead copper, pour order 1035): 31.369,101.473 34.417,101.473 34.671,101.219 34.671,100.965 34.671,97.155 34.417,96.901 34.29,96.901 31.115,96.901 30.988,97.028 30.988,97.79 30.988,101.346 31.115,101.473 31.369,101.473
GND on Top Layer "Top Layer-No Net" (hatched 90Degree grid 0.254 track 0.254, remove dead copper, pour order 1036): 26.924,104.902 18.415,104.902 18.161,105.156 18.161,107.686 18.515,108.04 20.156,108.04 26.834,108.04 27.178,107.696 27.178,106.807 27.178,105.156 26.924,104.902
GND on Top Layer "Top Layer-No Net" (hatched 90Degree grid 0.254 track 0.254, remove dead copper, pour order 1037): 53.213,43.18 53.213,42.037 53.213,40.513 53.721,40.005 54.991,40.005 55.753,40.005 55.88,40.132 55.88,40.386 55.88,40.767 55.372,41.275 54.737,41.91 54.737,43.053 54.737,46.482 53.213,46.482 53.213,43.18
AGND on Top Layer "Top Layer-No Net" (hatched 90Degree grid 0.254 track 0.254, remove dead copper, pour order 1038): 69.85,36.957 72.136,36.957 73.025,36.957 73.152,36.83 73.279,36.703 73.279,36.195 73.279,35.814 73.152,35.687 72.771,35.687 69.85,35.687 69.723,35.814 69.723,36.703 69.723,36.83 69.85,36.957
NetP3_1 on Top Layer "Top Layer-No Net 1" (hatched 90Degree grid 0.254 track 0.254, remove dead copper, pour order 1000): 24.892,54.229 21.844,54.229 18.288,54.229 15.621,56.896 13.843,58.674 13.843,60.833 13.843,62.865 13.335,63.373 12.954,63.754 9.779,63.754 9.271,63.754 9.144,63.881 9.144,64.135 9.144,64.77 9.271,64.897 9.398,65.024 9.779,65.024 14.097,65.024 14.986,64.135 15.367,63.754 15.367,61.341 15.367,59.055 15.367,58.928 18.796,55.499 19.304,54.991 25.273,54.991 25.273,54.229 24.892,54.229
NetP3_6 on Top Layer "Top Layer-No Net 1" (hatched 90Degree grid 0.254 track 0.254, remove dead copper, pour order 1001): 9.525,57.277 14.351,57.277 17.78,53.848 19.177,52.451 25.273,52.451 25.273,51.562 20.701,51.562 18.288,51.562 16.891,52.959 13.97,55.88 9.779,55.88 9.525,55.88 9.144,56.261 9.144,56.642 9.144,56.896 9.525,57.277
NetP1_1 on Top Layer "Top Layer-No Net 1" (hatched 90Degree grid 0.254 track 0.254, remove dead copper, pour order 1002): 25.019,43.561 23.368,43.561 22.479,43.561 21.971,44.069 21.336,44.704 19.558,44.704 16.256,44.704 13.843,47.117 11.43,49.53 9.652,49.53 9.398,49.53 9.271,49.657 9.271,49.784 9.271,50.927 9.398,51.054 9.525,51.054 11.557,51.054 13.335,49.276 16.51,46.101 20.447,46.101 21.209,46.101 22.479,44.831 22.987,44.323 25.273,44.323 25.273,43.561 25.019,43.561
NetP1_6 on Top Layer "Top Layer-No Net 1" (hatched 90Degree grid 0.254 track 0.254, remove dead copper, pour order 1003): 24.892,41.783 22.225,41.783 21.844,41.402 21.463,41.021 9.906,41.021 9.525,41.021 9.271,40.767 9.144,40.64 9.144,40.386 9.144,39.751 9.398,39.497 10.033,39.497 25.146,39.497 25.4,39.751 25.4,40.767 25.4,41.656 25.273,41.783 24.892,41.783
NetP7_1 on Top Layer "Top Layer-No Net 1" (hatched 90Degree grid 0.254 track 0.254, remove dead copper, pour order 1004): 36.322,44.323 32.893,44.323 32.004,43.434 31.623,43.053 31.623,42.291 31.623,41.402 30.734,40.513 26.67,36.449 10.541,36.449 9.271,36.449 9.017,36.195 9.017,35.179 9.144,35.052 9.906,35.052 26.416,35.052 30.734,39.37 32.639,41.275 32.639,42.037 32.639,42.672 33.02,43.053 33.528,43.561 36.703,43.561 36.703,44.323 36.322,44.323
NetP7_6 on Top Layer "Top Layer-No Net 1" (hatched 90Degree grid 0.254 track 0.254, remove dead copper, pour order 1005): 36.449,41.783 33.909,41.783 32.766,40.64 26.416,34.29 17.018,34.29 12.573,34.29 11.684,33.401 11.684,33.02 11.684,27.178 11.049,26.543 10.922,26.416 9.906,26.416 9.525,26.416 9.271,26.162 9.144,26.035 9.144,25.908 9.144,25.273 9.525,24.892 10.287,24.892 12.065,24.892 12.573,25.4 12.7,25.527 12.7,26.035 12.7,32.258 13.081,32.639 13.589,33.147 19.939,33.147 26.416,33.147 33.02,39.751 34.29,41.021 36.576,41.021 36.576,41.656 36.449,41.783
NetR11_2 on Top Layer "Top Layer-No Net 1" (hatched 90Degree grid 0.254 track 0.254, remove dead copper, pour order 1006): 33.528,39.116 35.052,39.116 35.687,39.116 35.941,38.862 35.941,38.735 35.941,35.56 35.814,35.433 35.687,35.306 35.56,35.306 33.274,35.306 33.147,35.433 33.147,35.56 33.147,38.735 33.528,39.116
NetR11_2 on Top Layer "Top Layer-No Net 1" (hatched 90Degree grid 0.254 track 0.254, remove dead copper, pour order 1007): 36.576,43.18 34.417,43.18 33.528,43.18 33.274,42.926 33.274,42.799 33.274,42.291 33.401,42.164 33.909,42.164 36.576,42.164 36.703,42.291 36.703,42.418 36.703,43.053 36.576,43.18
VCC on Top Layer "Top Layer-No Net 1" (hatched 90Degree grid 0.254 track 0.254, remove dead copper, pour order 1008): 79.375,28.321 73.025,28.321 70.485,28.321 69.723,29.083 69.215,29.591 67.564,29.591 65.913,29.591 65.659,29.845 65.532,29.972 65.532,30.353 65.532,32.131 65.278,32.385 65.151,32.385 63.119,32.385 62.865,32.131 62.865,32.004 62.865,30.226 62.357,29.718 61.722,29.718 57.531,29.718 56.515,28.702 55.626,27.813 55.626,26.162 55.626,24.765 54.737,23.876 54.356,23.495 52.832,23.495 52.07,23.495 51.816,23.749 51.689,23.876 51.689,26.67 51.689,27.559 51.562,27.686 51.308,27.686 50.038,27.686 49.911,27.559 49.911,27.305 49.911,26.035 49.53,25.654 49.403,25.527 48.895,25.527 47.625,25.527 47.371,25.273 47.244,25.146 47.244,25.019 47.244,23.368 47.752,22.86 48.133,22.479 53.467,22.479 58.928,22.479 59.436,22.987 59.436,23.114 59.436,26.035 59.944,26.543 60.071,26.67 71.501,26.67 79.629,26.67 79.756,26.797 79.756,26.924 79.756,28.194 79.629,28.321 79.375,28.321
NetF1_1 on Top Layer "Top Layer-No Net 1" (hatched 90Degree grid 0.254 track 0.254, remove dead copper, pour order 1009): 71.12,26.035 60.96,26.035 60.452,25.527 60.452,25.4 60.452,23.114 60.706,22.86 60.833,22.733 61.595,22.733 71.628,22.733 71.882,22.987 71.882,25.908 71.755,26.035 71.12,26.035
GND on Top Layer "Top Layer-No Net 1" (hatched 90Degree grid 0.254 track 0.254, remove dead copper, pour order 1010): 74.168,26.035 79.248,26.035 79.629,25.654 79.629,25.4 79.629,23.368 79.375,23.114 79.121,22.86 78.613,22.86 73.66,22.86 73.533,22.987 73.533,23.241 73.533,25.781 73.66,25.908 73.787,26.035 74.168,26.035
NetD3_1 on Top Layer "Top Layer-No Net 1" (hatched 90Degree grid 0.254 track 0.254, remove dead copper, pour order 1011): 40.64,33.02 59.182,33.02 59.563,32.639 59.563,32.258 59.563,30.861 59.309,30.607 57.531,30.607 56.388,29.464 56.134,29.21 52.832,29.21 52.324,29.21 52.197,29.337 52.197,29.591 52.197,30.48 51.943,30.734 51.689,30.988 50.165,30.988 40.259,30.988 40.259,33.02 40.64,33.02
+15V on Top Layer "Top Layer-No Net 1" (hatched 90Degree grid 0.254 track 0.254, remove dead copper, pour order 1012): 31.115,33.02 37.338,33.02 37.973,33.02 38.1,32.893 38.354,32.639 38.354,31.623 38.354,24.384 38.481,24.257 38.608,24.13 38.608,24.003 38.608,23.114 38.481,22.987 38.354,22.86 38.1,22.86 36.576,22.86 36.195,23.241 36.195,23.622 36.195,27.051 34.798,28.448 34.036,29.21 31.623,29.21 30.226,29.21 30.226,29.591 30.226,32.639 30.607,33.02 31.115,33.02
+5V on Top Layer "Top Layer-No Net 1" (hatched 90Degree grid 0.254 track 0.254, remove dead copper, pour order 1014): 85.455,49.403 85.455,52.721 85.09,53.086 83.312,54.864 64.008,54.864 64.008,52.959 64.389,52.578 65.913,51.054 75.819,51.054 76.581,50.292 76.581,49.149 81.859,49.149 82.198,48.809
AGND on Top Layer "Top Layer-No Net 1" (hatched 90Degree grid 0.254 track 0.254, remove dead copper, pour order 1015): 108.712,23.622 105.41,23.622 105.029,24.003 104.521,24.511 104.521,27.051 104.521,28.702 105.029,29.21 105.156,29.21 108.966,29.21 109.22,28.956 109.347,28.829 109.347,28.067 109.347,24.003 108.966,23.622 108.712,23.622
GND on Top Layer "Top Layer-No Net 1" (hatched 90Degree grid 0.254 track 0.254, remove dead copper, pour order 1016): 37.846,35.433 41.148,35.433 41.402,35.687 42.037,36.322 42.037,40.767 42.037,41.402 41.783,41.656 41.783,41.783 38.864,41.783 38.661,41.986 38.61,42.037 37.465,42.037 37.465,35.814 37.846,35.433
GND on Top Layer "Top Layer-No Net 1" (hatched 90Degree grid 0.254 track 0.254, remove dead copper, pour order 1017): 28.448,41.783 30.226,41.783 30.48,41.783 30.607,41.656 30.607,41.148 29.972,40.513 26.797,37.338 26.035,37.338 25.781,37.592 25.781,37.846 25.781,38.481 27.813,40.513 28.448,41.148 28.448,41.783
GND on Top Layer "Top Layer-No Net 1" (hatched 90Degree grid 0.254 track 0.254, remove dead copper, pour order 1018): 74.93,50.165 64.77,50.165 63.373,48.768 62.484,47.879 62.484,40.563 67.106,40.563 68.707,42.164 67.183,42.164 65.913,42.164 65.405,42.672 65.151,42.926 65.151,44.069 65.151,47.879 65.532,48.26 65.659,48.387 70.231,48.387 75.565,48.387 75.819,48.641 75.819,48.768 75.819,49.911 75.565,50.165 74.93,50.165
GND on Top Layer "Top Layer-No Net 1" (hatched 90Degree grid 0.254 track 0.254, remove dead copper, pour order 1019): 67.564,32.258 71.247,32.258 71.628,31.877 71.628,31.623 71.628,30.734 71.374,30.48 71.12,30.226 68.199,30.226 67.691,30.226 67.437,30.48 67.31,30.607 67.31,32.004 67.564,32.258
+5V on Top Layer "Top Layer-No Net 1" (hatched 90Degree grid 0.254 track 0.254, remove dead copper, pour order 1000): 74.93,32.131 75.692,32.131 75.946,32.385 76.073,32.512 76.073,32.893 76.073,39.116 76.2,39.243 76.284,39.327 78.486,39.327 78.57,39.327 78.867,39.624 78.867,40.259 78.867,43.18 77.978,44.069 76.327,45.72 76.327,46.99 76.327,47.498 77.216,48.387 83.566,48.387 85.471,48.387 85.455,48.403 85.455,49.657 77.089,49.657 76.581,50.165 76.581,49.149 76.581,48.768 75.692,47.879 75.438,47.625 72.39,47.625 66.294,47.625 66.294,44.45 66.294,43.688 66.675,43.307 67.183,42.799 70.612,42.799 73.66,42.799 73.914,42.545 74.168,42.291 74.168,36.83 74.168,32.512 74.422,32.258 74.549,32.131 74.93,32.131
+5V on Top Layer "Top Layer-No Net 1" (hatched 90Degree grid 0.254 track 0.254, remove dead copper, pour order 1001): 78.867,39.624 78.867,37.846 78.74,37.719 78.613,37.592 78.486,37.592 76.404,37.592 75.819,37.007 75.444,37.382 75.444,38.227 75.444,39.116 75.698,39.37 76.327,39.999 76.327,40.309 76.765,40.309 76.968,40.513
AGND on MidLayer1 "Top Layer-No Net 1" (hatched 90Degree grid 0.254 track 0.254, remove dead copper, pour order 1001): 101.981,21.933 131.826,21.933 140.208,21.933 140.208,35.56 140.208,39.751 cw(c142.748,39.751) 142.748,42.291 143.764,42.291 146.389,42.291 ccw(c146.389,43.18) 147.278,43.18 147.278,55.532 93.428,55.532 93.428,21.977 ccw(c93.472,21.977) 93.472,21.933 101.981,21.933
GND on MidLayer1 "Top Layer-No Net 1" (hatched 90Degree grid 0.254 track 0.254, remove dead copper, pour order 1000): 9.779,21.933 80.137,21.933 83.312,21.933 91.377,21.933 91.377,49.276 91.377,54.102 85.725,54.102 47.117,67.056 40.894,81.153 40.005,108.966 38.608,110.363 8.128,110.363 7.278,108.712 6.985,23.495 8.636,21.933 8.763,21.933
+5V on MidLayer1 "Top Layer-No Net 1" (hatched 90Degree grid 0.254 track 0.254, remove dead copper, pour order 1020): 116.459,22.987 113.03,22.987 112.776,23.241 112.776,24.003 112.776,40.513 111.887,41.402 111.633,41.656 97.028,41.656 96.901,41.656 96.647,41.91 96.52,42.037 96.52,42.418 96.52,42.926 96.647,43.053 96.774,43.18 97.663,43.18 112.395,43.18 113.538,42.037 113.919,41.656 113.919,40.386 113.919,24.638 114.173,24.384 114.3,24.257 114.935,24.257 116.205,24.257 116.459,24.003 116.586,23.876 116.586,23.622 116.586,23.114 116.459,22.987
GND2 on MidLayer1 "Top Layer-No Net 1" (hatched 90Degree grid 0.254 track 0.254, remove dead copper, pour order 1001): 117.094,109.933 141.986,109.933 147.278,109.933 147.278,106.172 147.278,57.404 113.157,57.404 96.139,57.404 96.139,59.436 96.139,109.933 117.221,109.933
VCC on MidLayer2 "Top Layer-No Net 1" (hatched 90Degree grid 0.254 track 0.254, remove dead copper, pour order 1002): 9.788,21.984 80.146,21.984 83.321,21.984 91.386,21.984 91.386,49.327 91.386,54.153 85.734,54.153 47.126,67.107 40.903,81.204 40.014,109.017 38.617,110.414 8.137,110.414 7.287,108.763 6.994,23.546 8.645,21.984 8.772,21.984
+5V on MidLayer2 "Top Layer-No Net 1" (hatched 90Degree grid 0.254 track 0.254, remove dead copper, pour order 1021): 97.028,42.926 86.741,42.926 75.565,42.926 74.549,41.91 74.168,41.529 74.168,40.64 74.168,39.751 74.422,39.497 74.93,39.497 75.184,39.497 75.565,39.878 75.692,40.005 75.692,40.132 75.692,40.894 76.2,41.402 76.454,41.656 97.155,41.656 97.282,41.656 97.409,41.783 97.409,42.037 97.409,42.799 97.282,42.926 97.028,42.926
+5VV on MidLayer2 "Top Layer-No Net 1" (hatched 90Degree grid 0.254 track 0.254, remove dead copper, pour order 1004): 117.094,109.933 141.986,109.933 147.278,109.933 147.278,106.172 147.278,57.404 113.157,57.404 96.139,57.404 96.139,59.436 96.139,109.933 117.221,109.933
+5V on MidLayer2 "Top Layer-No Net 1" (hatched 90Degree grid 0.254 track 0.254, remove dead copper, pour order 1001): 101.981,21.933 131.826,21.933 140.208,21.933 140.208,35.56 140.208,39.751 cw(c142.748,39.751) 142.748,42.291 143.764,42.291 146.389,42.291 ccw(c146.389,43.18) 147.278,43.18 147.278,55.532 93.428,55.532 93.428,21.977 ccw(c93.472,21.977) 93.472,21.933 101.981,21.933
NetR4_2 on Bottom Layer "Top Layer-No Net" (hatched 90Degree grid 0.254 track 0.254, remove dead copper, pour order 1046): 21.082,53.721 22.987,53.721 23.241,53.467 23.241,53.213 23.241,50.927 23.622,50.546 23.749,50.419 25.019,50.419 25.146,50.419 25.4,50.165 25.4,49.911 25.4,47.117 25.273,46.99 24.765,46.99 23.495,46.99 23.114,47.371 20.701,49.784 20.701,53.086 20.701,53.594 20.828,53.721 21.082,53.721
NetR11_2 on Bottom Layer "Top Layer-No Net 1" (hatched 90Degree grid 0.254 track 0.254, remove dead copper, pour order 1022): 34.925,35.306 35.433,35.306 35.687,35.306 35.941,35.56 35.941,35.941 35.941,40.259 35.052,41.148 34.798,41.402 34.798,42.418 34.798,42.799 34.671,42.926 34.544,43.053 34.417,43.053 33.528,43.053 33.401,42.926 33.274,42.799 33.274,42.545 33.274,41.021 33.909,40.386 34.417,39.878 34.417,38.862 34.417,35.56 34.671,35.306 34.925,35.306
+5V on Bottom Layer "Top Layer-No Net 1" (hatched 90Degree grid 0.254 track 0.254, remove dead copper, pour order 1023): 65.786,51.689 51.562,51.689 43.434,51.689 40.132,54.991 36.957,58.166 36.957,60.325 37.338,60.706 37.592,60.706 37.973,60.706 38.227,60.452 38.354,60.325 38.354,60.071 38.354,58.293 43.18,53.467 43.638,53.009 64.643,53.009 65.736,53.009 65.913,52.832 65.913,52.578 65.913,51.816 65.786,51.689

## Keep-outs
Keep-Out Layer:
  circle w0.1: c46.778,37.105 r1.6
  circle w0.1: c107.778,37.105 r1.6
  circle w0.1: c16.278,89.933 r1.6
  circle w0.05: c77.278,89.933 r0.025
  circle w0.05: c77.278,89.933 r0.025
  circle w0.05: c77.278,89.933 r0.025
  circle w0.05: c77.278,89.933 r0.025
  circle w0.1: c46.803,37.105 r1.6
  circle w0.1: c107.803,37.105 r1.6
  circle w0.1: c16.303,89.933 r1.6
  lines w0.1: 81.094,21.933 146.278,21.933 147.278,22.933 147.278,108.933 146.278,109.933 115.778,109.933 114.778,108.933 114.778,89.933 cw(c77.278,89.933) 39.778,89.933 39.778,108.933 38.778,109.933 8.278,109.933 7.278,108.933 7.278,22.933 8.278,21.933 73.462,21.933 82.169,21.933

## Other copper
Bottom Layer:
  region net NetP13_1: 32.893,84.125 32.893,93.777 22.098,93.777 22.098,84.125
  region net NetP13_6: 22.225,82.093 22.225,72.441 33.02,72.441 33.02,82.093

## Silkscreen, mask and mechanical layers (free items; w line width, h text height)
Top Overlay:
  circle w0.5: c142.438,108.228 r0.2
  circle w0.254: c16.303,89.933 r4
  circle w0.254: c46.803,37.105 r4
  circle w0.254: c107.803,37.105 r4
  text "ISP" at 142.799,103.146 h2.5
  text "翻转" at 8.007,85.646 h2.5
  text "+" at 143.317,83.231 h0.8
  text "M-" at 14.351,82.042 h0.8
  text "T" at 143.233,80.655 h0.8
  text "+5V" at 14.351,79.756 h0.8
  text "R" at 143.338,78.177 h0.8
  text "A" at 14.351,77.089 h0.8
  text "-" at 143.254,75.657 h0.8
  text "B" at 14.351,74.295 h0.8
  text "GND" at 14.351,71.882 h0.8
  text "M+" at 14.351,69.469 h0.8
  text "M-" at 12.7,64.025 h0.8
  text "GND" at 12.7,62.501 h0.8
  text "A" at 12.7,60.977 h0.8
  text "斜刀" at 13.593,59.725 h2.5
  text "B" at 12.7,59.453 h0.8
  text "+5V" at 12.7,57.929 h0.8
  text "M+" at 12.7,56.405 h0.8
  text "+5V" at 136.437,53.838 h0.8
  text "调刀" at 8.189,52.956 h2.5
  text "GND" at 136.437,51.298 h0.8
  text "M-" at 13.343,50.092 h0.8
  text "RX3" at 136.437,48.758 h0.8
  text "+5V" at 13.343,47.933 h0.8
  text "TX3" at 136.437,46.218 h0.8
  text "A" at 13.343,45.901 h0.8
  text "B" at 13.343,44.123 h0.8
  text "GND" at 13.343,41.964 h0.8
  text "M+" at 13.343,39.932 h0.8
  text "夹紧" at 13.593,36.933 h2.5
  text "M-" at 13.347,35.292 h0.8
  text "+5V" at 13.347,33.26 h0.8
  text "光电开关" at 19.685,33.147 h2.5
  text "光纤" at 29.083,33.147 h2.5
  text "A" at 13.347,31.482 h0.8
  text "-" at 79.121,31.165 h0.8
  text "+" at 75.057,31.115 h0.8
  text "O" at 77.089,30.988 h0.8
  text "+" at 34.712,29.751 h0.8
  text "B" at 13.347,29.45 h0.8
  text "电源输入" at 68.956,27.993 h2.5
  text "GND" at 13.347,27.45 h0.8
  text "-" at 34.712,27.056 h0.8
  text "GND" at 74.675,26.608 h0.8
  text "VCC" at 68.872,26.524 h0.8
  text "M+" at 13.347,25.386 h0.8
  text "IO" at 34.712,24.676 h0.8
Top Solder:
  lines w1: 115.723,59.228 115.723,62.56 ; 115.723,68.626 115.723,71.958 ; 115.723,78.023 115.723,81.355 ; 115.723,87.421 115.723,90.753 ; 115.723,96.818 115.723,100.15 ; 117.018,57.856 120.35,57.856 ; 117.018,102.615 120.35,102.615 ; 126.919,57.856 130.251,57.856 ; 126.919,102.615 130.251,102.615 ; 136.821,57.856 140.153,57.856 ; 136.821,102.615 140.153,102.615 ; 141.525,59.228 141.525,62.56 ; 141.525,68.626 141.525,71.958 ; 141.525,78.023 141.525,81.355 ; 141.525,87.421 141.525,90.753 ; 141.525,96.818 141.525,100.15
Mechanical 15:
  lines w0.254: 91.377,21.933 91.377,55.168 ; 93.428,21.933 93.428,55.532 147.278,55.532 ; 95.885,57.404 147.278,57.404

## Dimensions
7.278,108.933 to 147.278,108.933 on Top Overlay
8.278,109.933 to 8.278,21.933 on Top Overlay

## Text inside footprints (layer, text, board x,y; h text height)
LS1: Top Overlay "+" at 132.252,52.144 h0.8 r270
P10: Top Overlay "1" at 141.497,107.668 h0.8; Top Overlay "2" at 141.539,104.959 h0.8; Top Overlay "5" at 132.131,107.57 h0.8; Top Overlay "6" at 132.264,104.819 h0.8
U12: Top Overlay "GND" at 130.099,39.497 h0.8 r270; Top Overlay "NC" at 128.843,39.497 h0.8 r270; Top Overlay "M0" at 127.587,39.497 h0.8 r270; Top Overlay "M1" at 126.331,39.497 h0.8 r270; Top Overlay "M2" at 125.075,39.497 h0.8 r270; Top Overlay "RXD" at 123.819,39.497 h0.8 r270; Top Overlay "TXD" at 122.563,39.497 h0.8 r270; Top Overlay "AUX" at 121.308,39.497 h0.8 r270; Top Overlay "VCC" at 120.052,39.497 h0.8 r270; Top Overlay "GND" at 118.796,39.497 h0.8 r270; Top Overlay "GND" at 118.923,27.178 h0.8 r270; Top Overlay "NC" at 120.179,27.178 h0.8 r270; Top Overlay "NC" at 121.435,27.178 h0.8 r270; Top Overlay "NC" at 122.69,27.178 h0.8 r270; Top Overlay "NC" at 123.946,27.178 h0.8 r270; Top Overlay "NC" at 125.202,27.178 h0.8 r270; Top Overlay "NC" at 126.458,27.178 h0.8 r270; Top Overlay "NC" at 127.714,27.178 h0.8 r270; Top Overlay "NC" at 128.97,27.178 h0.8 r270; Top Overlay "GND" at 130.226,27.178 h0.8 r270; Top Overlay "ANT" at 143.561,33.02 h0.8 r270